# Altium PCB transfer.PcbDoc
Units mm, origin at the board's own origin, x right, y up, seen from the top; angles counter-clockwise.
Board outline 13 x 9 mm, 2 copper layers (Top Layer, Bottom Layer); 1 components, 0 nets, 10 pads, 0 vias.
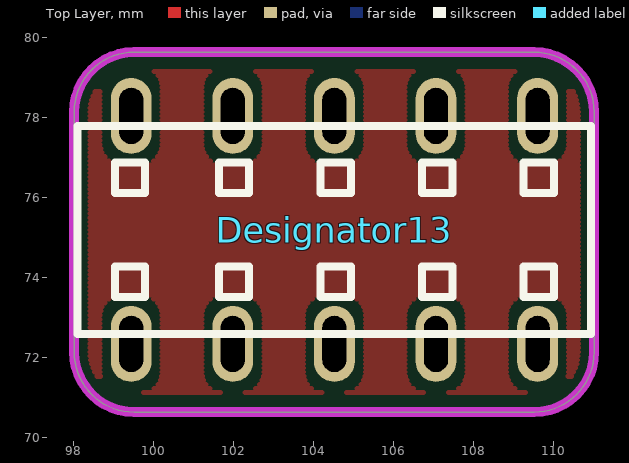
[diagram p0: Top Layer view]
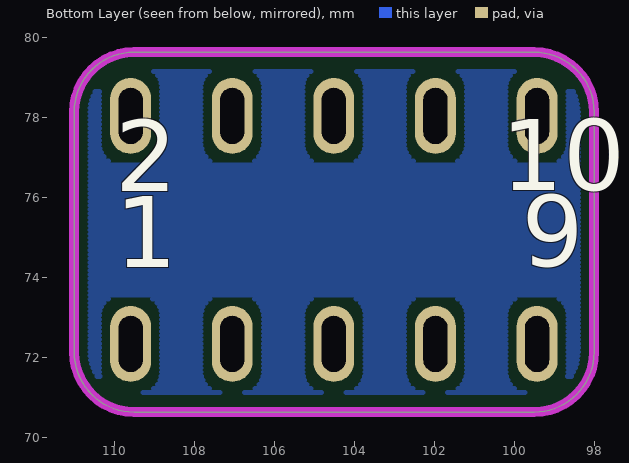
[diagram p1: Bottom Layer view, seen from below]

## Layer stack, top to bottom
Top Solder: solder mask 0.0102, Solder Resist, Dk 3.5
Top Layer: signal copper 0.0356
Dielectric 1: dielectric 0.32, FR-4, Dk 4.8
Bottom Layer: signal copper 0.0356
Bottom Solder: solder mask 0.0102, Solder Resist, Dk 3.5

## Board outline
98.014,72.129 98.014,78.129 cw(c99.514,78.129) 99.514,79.629 109.514,79.629 cw(c109.514,78.129) 111.014,78.129 111.014,72.129 cw(c109.514,72.129) 109.514,70.629 99.514,70.629 cw(c99.514,72.129)

## Design rules (kind name [scope] priority, off if disabled: settings)
Clearance [All] p1: gap=0.203 ignorepadtopadclearanceinfootprint=TRUE
PlaneConnect [All] p1: planeconnectstyle=Direct reliefexpansion=0.508 reliefentries=4 reliefconductorwidth=0.254 reliefairgap=0.254
PolygonConnect [All] p1: connectstyle=Direct reliefconductorwidth=0.762 reliefentries=4 polygonreliefangle="90 Angle" airgapwidth=0.254
RoutingVias [All] p1: holewidth=0.305 width=0.61 viastyle="Through Hole" minholewidth=0.305 minwidth=0.61 maxholewidth=0.305 maxwidth=0.61
SolderMaskExpansion [All] p1: expansion=0.102 istentingtop=FALSE
Width [All] p1 off: maxlimit=0.254 minlimit=0.254 preferedwidth=0.254
29 further rules are at their usual default settings.

## Components (designator, comment, footprint, x,y, rotation, side; value= is the part's Value field where it differs from the comment)
Designator13 "Comment" HDR2.54-LS-2x5P 104.521,75.184 r0 top

## Footprints (in the part's own frame and the unit in brackets; to place one, negate y for a bottom-side part, rotate by r counter-clockwise, add the part's x,y. Pads: shape width x height; smd on the part's side, far side on the other; paste and mask are expansions set on the pad)
HDR2.54-LS-2x5P [mm] "脚距：2.54mm，贴片双排母"
  oval 1.02x1.9 hole 0.6 slot 1.4 at 90 deg: 1(-5.08,-2.85) 2(-5.08,2.85) 3(-2.54,-2.85) 4(-2.54,2.85) 5(0,-2.85) 6(0,2.85) 7(2.54,-2.85) 8(2.54,2.85) 9(5.08,-2.85) 10(5.08,2.85)
  silkscreen extent -6.42,-2.6 6.41,2.6, body extent -6.38,-3.2 6.38,3.2, height 5.15

## Nets (pads, with @x,y where several pads share a name; then routed paths per layer and width w, separated by ;. In a path a pad name is that pad's centre, name@x,y a point inside that pad or via, vN(x,y) a via of type N, cw(c..) or ccw(c..) an arc to the next point about the centre after c; other vN are vias at no path point)
pads on no net: Designator13.1 Designator13.2 Designator13.3 Designator13.4 Designator13.5 Designator13.6 Designator13.7 Designator13.8 Designator13.9 Designator13.10

## Polygon pours and split planes (outlines as drawn)
no net on Top Layer "NONET_L01_P-001" (hatched Horizontal grid 0.102 track 0.127, remove dead copper, pour order 1): 98.014,72.129 98.014,78.129 cw(c99.514,78.129) 99.514,79.629 109.514,79.629 cw(c109.514,78.129) 111.014,78.129 111.014,72.129 cw(c109.514,72.129) 109.514,70.629 99.514,70.629 cw(c99.514,72.129)
no net on Bottom Layer "NONET_L01_P-001" (hatched Horizontal grid 0.102 track 0.127, remove dead copper, pour order 0): 98.014,72.129 98.014,78.129 cw(c99.514,78.129) 99.514,79.629 109.514,79.629 cw(c109.514,78.129) 111.014,78.129 111.014,72.129 cw(c109.514,72.129) 109.514,70.629 99.514,70.629 cw(c99.514,72.129)

## Keep-outs
Keep-Out Layer:
  the board outline again, w0.254

## Silkscreen, mask and mechanical layers (free items; w line width, h text height)
Bottom Overlay:
  text "10" at 100.33,75.588 h3.05
  text "2" at 109.982,75.565 h3.05
  text "9" at 99.822,73.683 h3.05
  text "1" at 109.982,73.66 h3.05
Mechanical 1:
  the board outline again, w0.254